# Altium PCB Channel Fix (CMOS).PcbDoc
Units mil, origin at the board's own origin, x right, y up, seen from the top; angles counter-clockwise.
Board outline 1825 x 1150 mil, 2 copper layers (Top Layer, Bottom Layer); 23 components, 18 nets, 62 pads, 0 vias.
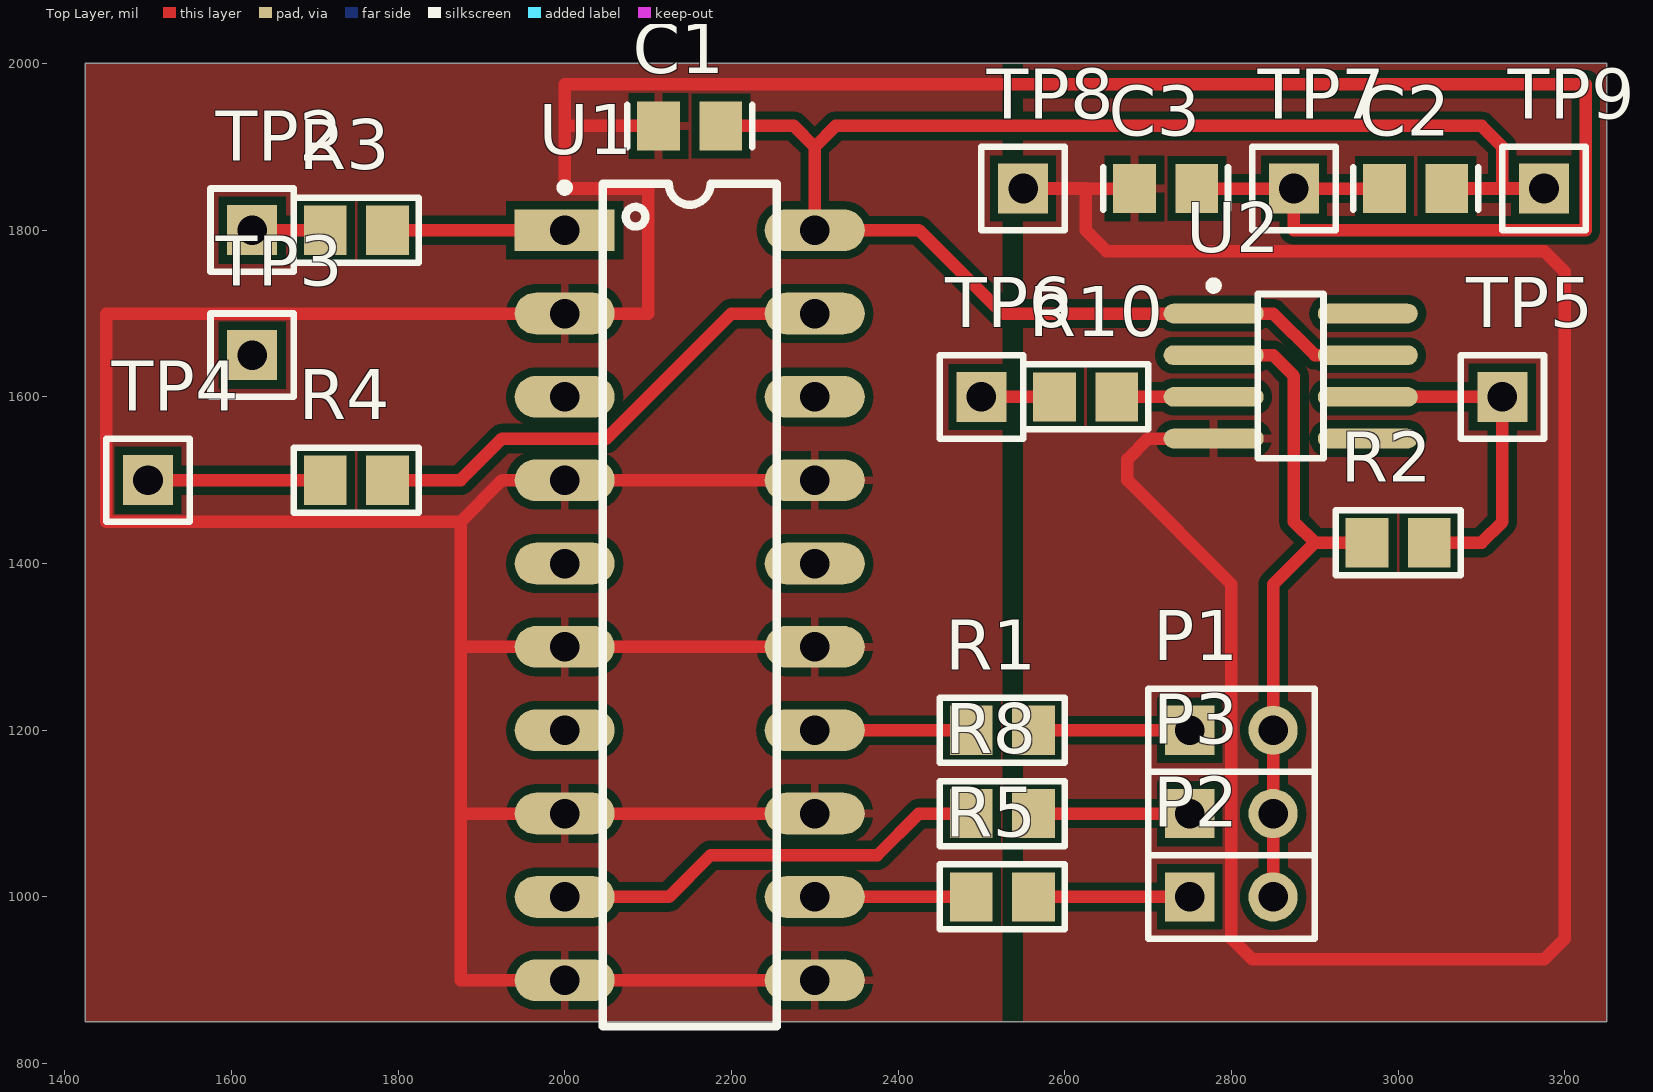
[diagram p0: Top Layer view]
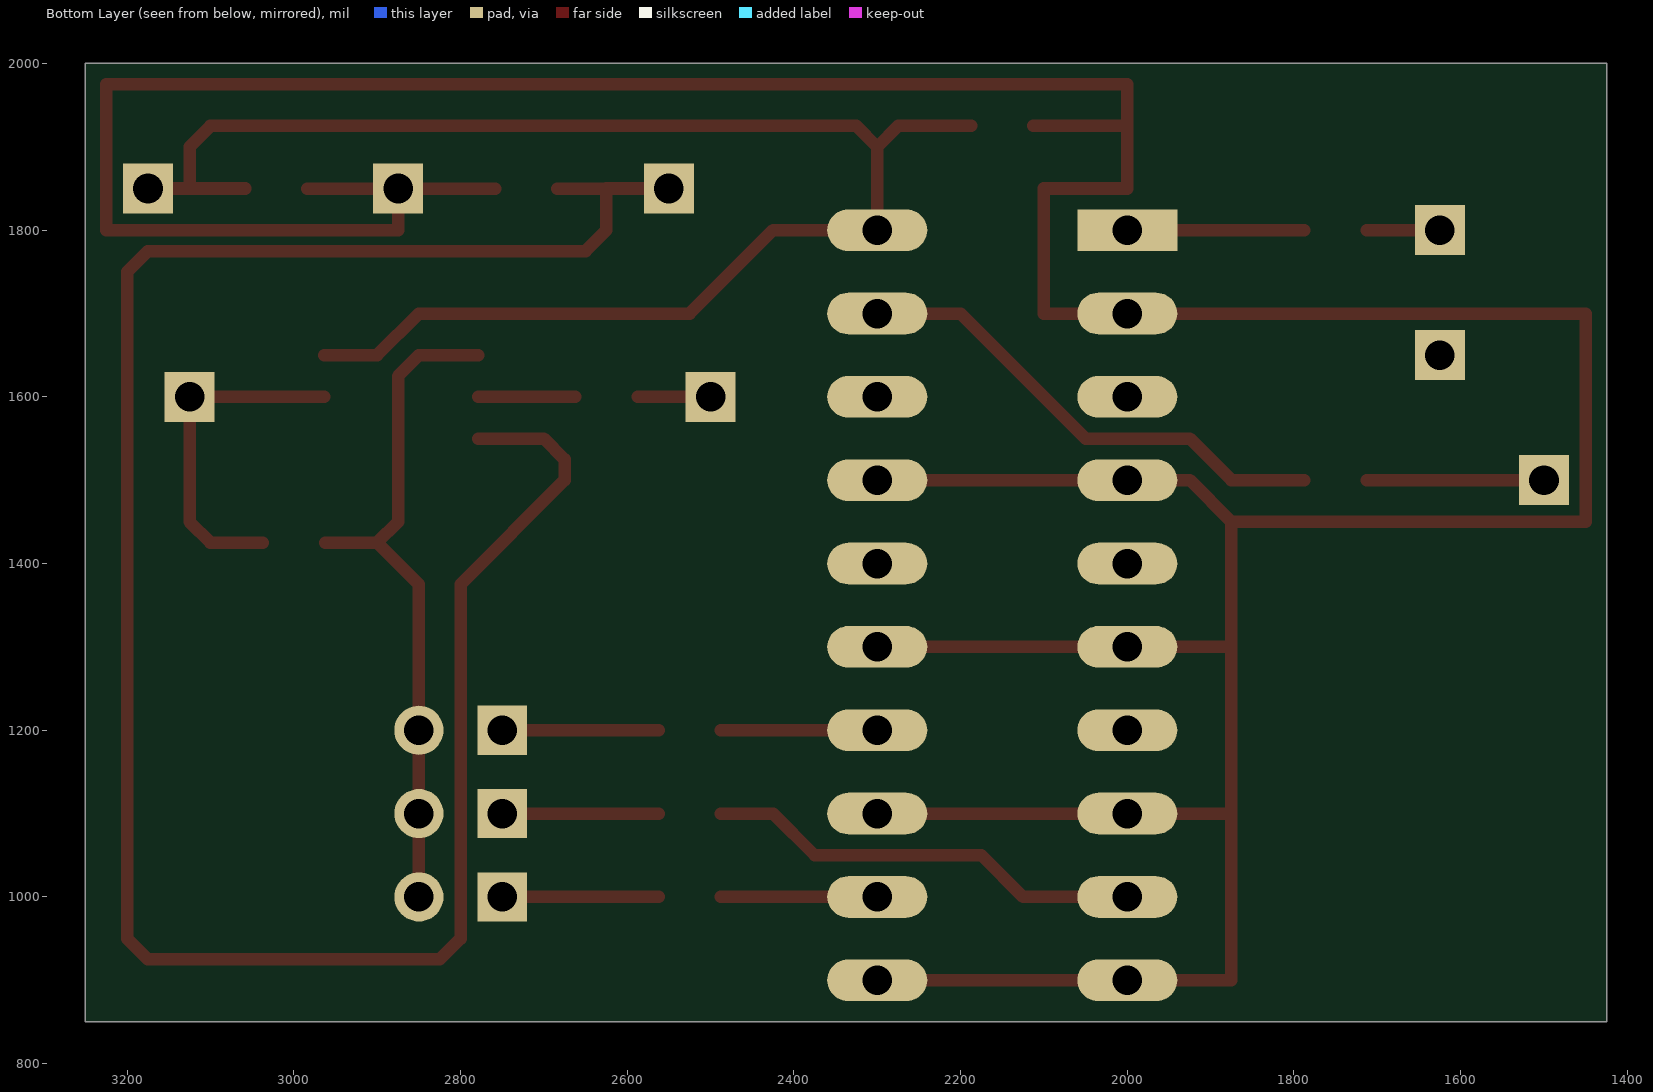
[diagram p1: Bottom Layer view, seen from below]

## Layer stack, top to bottom
Top Layer: signal copper 1.4
Dielectric: dielectric 12.6, FR-4, Dk 4.8
Bottom Layer: signal copper 1.4

## Board outline
1425,850 3250,850 3250,2000 1425,2000

## Design rules (kind name [scope] priority, off if disabled: settings)
Clearance [All] p1: gap=10
PolygonConnect [All] p1: connectstyle=Relief reliefconductorwidth=10 reliefentries=4 polygonreliefangle="90 Angle" airgapwidth=10
RoutingVias [All] p1: holewidth=28 width=50 viastyle="Through Hole" minholewidth=28 minwidth=50 maxholewidth=28 maxwidth=50
SolderMaskExpansion [All] p1: expansion=4
Width [All] p1: maxlimit=100 minlimit=10 preferedwidth=10
28 further rules are at their usual default settings.

## Components (designator, comment, footprint, x,y, rotation, side; value= is the part's Value field where it differs from the comment)
C1 "100nF" "CAP (3D) - 0805" 2150,1925 r0 top
C2 "100nF" "CAP (3D) - 0805" 3021.06,1850 r0 top
C3 "100nF" "CAP (3D) - 0805" 2721.06,1850 r0 top
P1 "Header 2" HDR1X2 2750,1200 r0 top
P2 "Header 2" HDR1X2 2750,1000 r0 top
P3 "Header 2" HDR1X2 2750,1100 r0 top
R1 "1k" "RES (3D) - 0805" 2525,1200 r0 top
R2 "100k" "RES (3D) - 0805" 3000,1425 r0 top
R3 "1k" "RES (3D) - 0805" 1750,1800 r0 top
R4 "1k" "RES (3D) - 0805" 1750,1500 r0 top
R5 "11k" "RES (3D) - 0805" 2525,1000 r0 top
R8 "100k" "RES (3D) - 0805" 2525,1100 r0 top
R10 "100R" "RES (3D) - 0805" 2625,1600 r0 top
TP2 "TestPoint" TP 1625,1800 r0 top
TP3 "TestPoint" TP 1625,1650 r0 top
TP4 "TestPoint" TP 1500,1500 r0 top
TP5 "TestPoint" TP 3125,1600 r0 top
TP6 "TestPoint" TP 2500,1600 r0 top
TP7 "TestPoint" TP 2875,1850 r0 top
TP8 "TestPoint" TP 2550,1850 r0 top
TP9 "TestPoint" TP 3175,1850 r0 top
U1 "MC74HC244ADTR2_vgnd" "DIP 20" 2150,1450 r0 top
U2 "MAX4238ASA+" SO-8 2871.06,1625 r0 top

## Footprints (in the part's own frame and the unit in brackets; to place one, negate y for a bottom-side part, rotate by r counter-clockwise, add the part's x,y. Pads: shape width x height; smd on the part's side, far side on the other; paste and mask are expansions set on the pad)
"CAP (3D) - 0805" [mm]
  rect 1.3x1.5 smd: 1(-0.95,0) 2(0.95,0)
  silkscreen extent -1.9,-0.65 1.9,0.65, body extent -1,-0.63 1,0.63, height 1
"DIP 20" [mil]
  rect 120x50 hole 35.43: 1(-150,350)
  oval 120x50 hole 35.43: 2(-150,250) 3(-150,150) 4(-150,50) 5(-150,-50) 6(-150,-150) 7(-150,-250) 8(-150,-350) 9(-150,-450) 10(-150,-550) 11(150,-550) 12(150,-450) 13(150,-350) 14(150,-250) 15(150,-150) 16(150,-50) 17(150,50) 18(150,150) 19(150,250) 20(150,350)
  silkscreen extent -155,-606 104,406
HDR1X2 [mm] "Connector; Header; 2 Position"
  rect 1.5x1.5 hole 0.9: 1(0,0)
  round 1.5 hole 0.9: 2(2.54,0)
  silkscreen extent -1.27,-1.27 3.81,1.27
"RES (3D) - 0805" [mm]
  rect 1.3x1.5 smd: 1(-0.95,0) 2(0.95,0)
  silkscreen extent -1.91,-0.99 1.91,0.99, body extent -1,-0.63 1,0.63, height 1
SO-8 [mm] "SOIC, 8-Leads, Body 4.9x3.9mm, Pitch 1.27mm, IPC High Density"
  oval 3.048x0.6 smd: 1(-2.35,1.905) 2(-2.35,0.635) 3(-2.35,-0.635) 4(-2.35,-1.905) 5(2.35,-1.905) 6(2.35,-0.635) 7(2.35,0.635) 8(2.35,1.905)
  silkscreen extent -2.47,-2.5 1,2.88, body extent -2.9,-2.45 3.1,2.45, height 1.75
TP [mil] "Connector; Header; 2 Position"
  rect 60x60 hole 35.43: 1(0,0)
  silkscreen extent -50,-50 50,50

## Part data
C1 C2 C3: library part Cap, "Capacitor"
P1 P2 P3: "Header, 2-Pin"
R1 R2 R3 R4 R5 R8 R10: library part "RES SMD 0603", "RESISTOR SMD 0603"
U1: library part MC74HC244ADTR2, "Octal 3-State Non-Inverting Buffer/Line Driver/Line Receiver"
U2: library part MAX495CSA, "Single Voltage-Feedback Operational Amplifier"

## Nets (pads, with @x,y where several pads share a name; then routed paths per layer and width w, separated by ;. In a path a pad name is that pad's centre, name@x,y a point inside that pad or via, vN(x,y) a via of type N, cw(c..) or ccw(c..) an arc to the next point about the centre after c; other vN are vias at no path point)
CHANNEL_SAMPLE: R2.2 TP5.1 U2.6 | length 409.4
  Top Layer w15: U2.6 TP5.1 3125,1450 3100,1425 R2.2
GND: C3.1 TP8.1 U2.4 | length 2740.7
  Top Layer w15: TP8.1 2625,1850 ; C3.1 2625,1850 ; U2.4 2700,1550 2675,1525 2675,1500 2800,1375 2800,950 2825,925 3175,925 3200,950 3200,1750 3175,1775 2650,1775 2625,1800 2625,1850
K004: R4.1 TP4.1 | length 212.6
  Top Layer w15: TP4.1 R4.1
K010: TP3.1
K100: R3.1 TP2.1 | length 87.6
  Top Layer w15: TP2.1 R3.1
NetP1_1: P1.1 R1.2 | length 187.6
  Top Layer w15: R1.2 P1.1
NetP1_2: P1.2 P2.2 P3.2 R2.1 U2.2 | length 825.5
  Top Layer w15: U2.2 2850,1650 2875,1625 2875,1450 2900,1425 ; P2.2 P3.2 P1.2 2850,1375 2900,1425 ; R2.1 2900,1425
NetP2_1: P2.1 R5.2 | length 187.6
  Top Layer w15: R5.2 P2.1
NetP3_1: P3.1 R8.2 | length 187.6
  Top Layer w15: R8.2 P3.1
NetR1_1: R1.1 U1.14 | length 187.6
  Top Layer w15: U1.14 R1.1
NetR3_2: R3.2 U1.1 | length 212.6
  Top Layer w15: R3.2 U1.1
NetR4_2: R4.2 U1.19 | length 595.4
  Top Layer w15: R4.2 1875,1500 1925,1550 2050,1550 2200,1700 U1.19
NetR5_1: R5.1 U1.12 | length 187.6
  Top Layer w15: U1.12 R5.1
NetR8_1: R8.1 U1.9 | length 529
  Top Layer w15: U1.9 2125,1000 2175,1050 2375,1050 2425,1100 R8.1
NetR10_2: R10.2 U2.3 | length 116.1
  Top Layer w15: R10.2 U2.3
SAMPLE: R10.1 TP6.1 | length 87.6
  Top Layer w15: TP6.1 R10.1
VCC: C1.2 C2.2 TP9.1 U1.20 U2.1 U2.7 | length 1960.9
  Top Layer w15: C1.2 2275,1925 2300,1900 ; U2.7 2900,1650 2850,1700 U2.1 2525,1700 2425,1800 U1.20 2300,1900 ; C2.2 3125,1850 ; TP9.1 3125,1850 ; 2300,1900 2325,1925 3100,1925 3125,1900 3125,1850
VGND: C1.1 C2.1 C3.2 TP7.1 U1.2 U1.4 U1.6 U1.8 U1.10 U1.11 U1.13 U1.15 U1.17 | length 6108.5
  Top Layer w15: C1.1 2000,1925 ; U1.11 U1.10 1875,900 1875,1100 ; U1.13 U1.8 1875,1100 ; U1.15 U1.6 1875,1300 ; U1.17 U1.4 1925,1500 1875,1450 ; C3.2 TP7.1 ; C2.1 TP7.1 ; 1875,1100 1875,1300 ; 1875,1300 1875,1450 ; 1875,1450 1450,1450 1450,1700 U1.2 2100,1700 2100,1850 2000,1850 2000,1925 ; 2000,1925 2000,1975 3225,1975 3225,1800 2875,1800 TP7.1
pads on no net: U1.3 U1.5 U1.7 U1.16 U1.18 U2.5 U2.8

## Polygon pours and split planes (outlines as drawn)
VGND on Top Layer "Mechanical 3-No Net" (solid, pour order 6): 1425,2000 1425,850 2525,850 2525,2000 1425,2000
GND on Top Layer "Mechanical 3-No Net" (solid, pour order 8): 2550,2000 2550,850 3250,850 3250,2000 2550,2000

## Silkscreen, mask and mechanical layers (free items; w line width, h text height)
Mechanical 1:
  lines w10: 1425,850 3250,850 3250,2000 1425,2000 1425,1925 1425,1425 1425,850